# Altium PCB V40TestAdapter.PcbDoc
Units mil, origin at the board's own origin, x right, y up, seen from the top; angles counter-clockwise.
Board outline 3500 x 8470.09 mil, 2 copper layers (Top Layer, Bottom Layer); 26 components, 35 nets, 195 pads, 31 vias.
Unrouted connection lines stored in the file: 8.
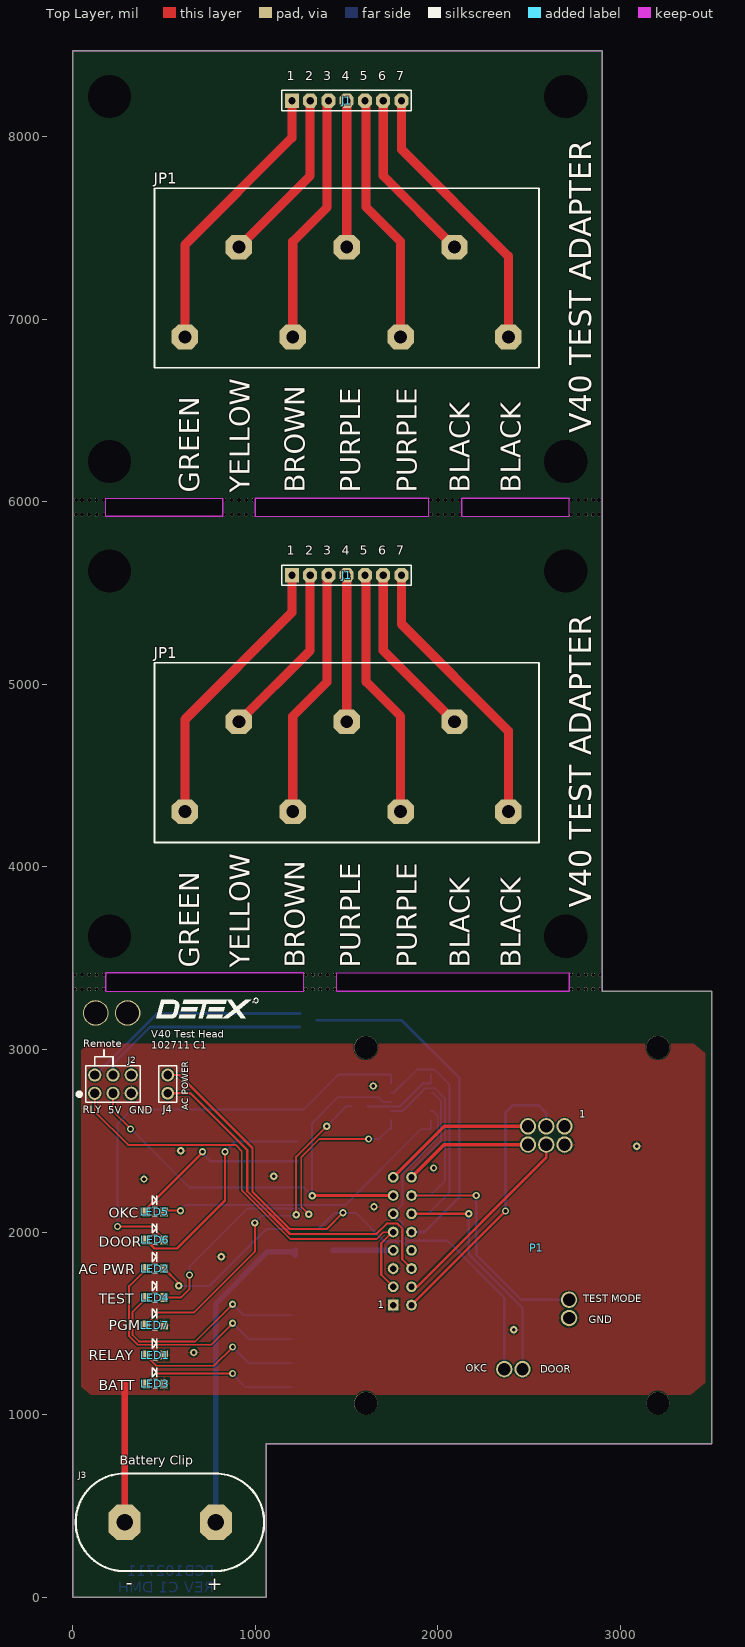
[diagram p0: Top Layer view]
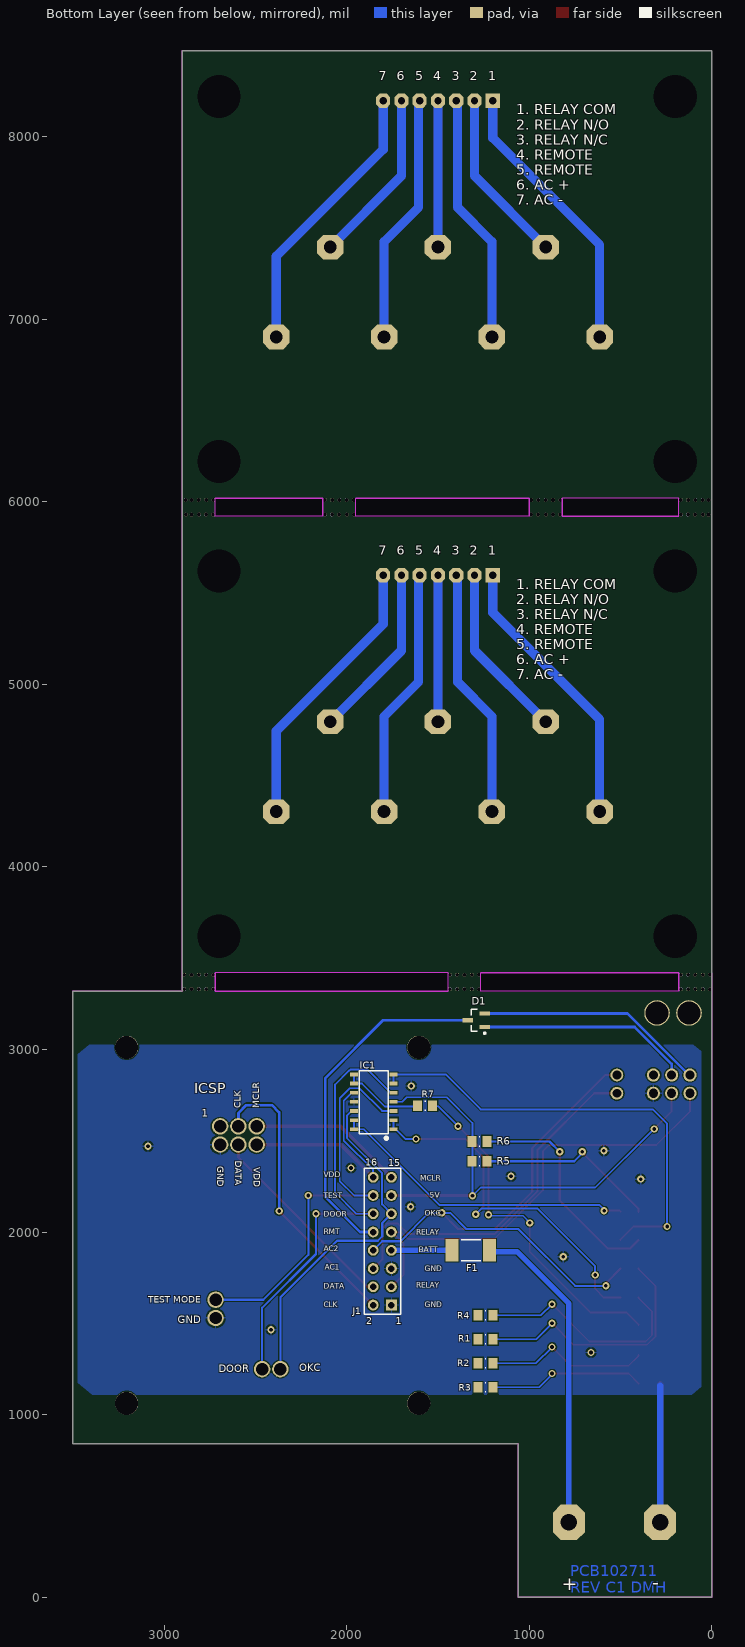
[diagram p1: Bottom Layer view, seen from below]

## Layer stack, top to bottom
Top Solder: solder mask 0.4, Solder Resist, Dk 3.5
Top Layer: signal copper 1.4
Dielectric 1: dielectric 12.6, FR-4, Dk 4.8
Bottom Layer: signal copper 1.4
Bottom Solder: solder mask 0.4, Solder Resist, Dk 3.5

## Board outline
0,0 1060,0 1060,840.16 3500,840.16 3500,3320.09 2900,3320.09 2900,8470.09 0,8470.09
cut-out: 1445,3320.09 1445,3420.09 2720,3420.09 2720,3320.09
cut-out: 1265,3320.09 1265,3420.09 180,3420.09 180,3320.09
cut-out: 1950,5920.09 1950,6020.09 1000,6020.09 1000,5920.09
cut-out: 2720,5920.09 2720,6020.09 2130,6020.09 2130,5920.09
cut-out: 180,5920.09 180,6020.09 820,6020.09 820,5920.09

## Design rules (kind name [scope] priority, off if disabled: settings)
Clearance [All] p1: gap=7 ignorepadtopadclearanceinfootprint=FALSE
PolygonConnect [All] p1: connectstyle=Relief reliefconductorwidth=10 reliefentries=4 polygonreliefangle="90 Angle" airgapwidth=10
RoutingVias [All] p1: holewidth=28 width=50 viastyle="Through Hole" minholewidth=28 minwidth=50 maxholewidth=28 maxwidth=50
SolderMaskExpansion [All] p1: expansion=4
Width [All] p1: maxlimit=150 minlimit=6 preferedwidth=12
30 further rules are at their usual default settings.

## Classes and differential pairs
component class V40TestAdapter: J1 JP1

## Components (designator, comment, footprint, x,y, rotation, side; value= is the part's Value field where it differs from the comment)
D1 "BAS70-05" SOT-23_M 1290,3160 r0 bottom
F1 "1812L050PR" LFUS-1812L050_V 1320,1900 r0 bottom
IC1 "LM324F-GE2" SOIC14 1743.46,2563.19 r90 bottom
J1 "2x8 Header" HDR2X8 1755,1600 r90 bottom
J1 "Header 7" HDR1X7 1200,8197.14 r0 top
J1 "Header 7" HDR1X7 1200,5597.14 r0 top
J2 "2x3 MOLEX" HDR2X3 120,2760 r0 top
J3 "DC POWER" BAT_CONN 783.47,409.45 r0 top locked
J4 "AC POWER" HDR1X2 520,2760 r90 top
JP1 "1792274" "7P TERMINAL BLOCK" 614.17,6902.97 r0 top locked
JP1 "1792274" "7P TERMINAL BLOCK" 614.17,4302.97 r0 top locked
LED1 "RELAY" LTST-C170YKT_V 450.47,1326.06 r0 top
LED2 "AC PWR" LTST-C170YKT_V 450.47,1800 r0 top
LED3 "BATT" LTST-C170YKT_V 451.18,1168.58 r0 top
LED4 "TEST" LTST-C170YKT_V 450.47,1641.02 r0 top
LED5 "OKC" LTST-C170YKT_V 450,2110 r0 top
LED6 "DOOR" LTST-C170YKT_V 450.47,1956.5 r0 top
LED7 "PGM" LTST-C170YKT_V 450,1490 r0 top
P1 "V40 POGOS" V40_POGOS 2693.19,2578.98 r0 top locked
R1 "Res1" RESC0805(2012)_M 1240,1412.5 r180 bottom value=3.3K
R2 "Res1" RESC0805(2012)_M 1240,1281.25 r180 bottom value=1K
R3 "Res1" RESC0805(2012)_M 1240,1150 r0 bottom value=1.5K
R4 "Res1" RESC0805(2012)_M 1240,1543.75 r180 bottom value=1K
R5 "Res1" RESC0805(2012)_M 1272,2388 r180 bottom value=1K
R6 "Res1" RESC0805(2012)_M 1272,2496 r0 bottom value=1K
R7 "Res1" RESC0805(2012)_M 1570,2692.15 r180 bottom value=1K

## Footprints (in the part's own frame and the unit in brackets; to place one, negate y for a bottom-side part, rotate by r counter-clockwise, add the part's x,y. Pads: shape width x height; smd on the part's side, far side on the other; paste and mask are expansions set on the pad)
"7P TERMINAL BLOCK" [mil] "Phoenix Contact - Push-Lock spring connection"
  oct 145x135 hole 70: 1(0,0) 2(295.28,492.13) 3(590.55,0) 4(885.83,492.13) 5(1181.1,0) 6(1476.38,492.13) 7(1771.65,0)
  silkscreen extent -167,-169 1939,815
BAT_CONN [mil]
  oct 175x195 hole 90: 1(0,0) 2(-500,0)
  silkscreen extent -768,-267 264,268
HDR1X2 [mil] "Connector; Header; 2 Position"
  round 70 hole 48: 1(0,0) 2(100,0)
  silkscreen extent -50,-50 150,50
HDR1X7 [mil] "Connector; Header; 7 Position"
  rect 77x80 hole 40: 1(0,0)
  oct 77x80 hole 40: 2(100,0) 3(200,0) 4(300,0) 5(400,0) 6(500,0) 7(600,0)
  silkscreen extent -56,-54 654,56
HDR2X3 [mil] "Connector; Header; 3x2 Position"
  round 72 hole 50: 1(0,0) 2(0,100) 3(100,0) 4(100,100) 5(200,0) 6(200,100)
  silkscreen extent -50,-50 250,150
HDR2X8 [mm] "Connector; Header; 8x2 Position"
  rect 1.5x1.5 hole 0.9: 1(0,0)
  round 1.5 hole 0.9: 2(0,2.54) 3(2.54,0) 4(2.54,2.54) 5(5.08,0) 6(5.08,2.54) 7(7.62,0) 8(7.62,2.54) 9(10.16,0) 10(10.16,2.54) 11(12.7,0) 12(12.7,2.54) 13(15.24,0) 14(15.24,2.54) 15(17.78,0) 16(17.78,2.54)
  silkscreen extent -1.27,-1.27 19.05,3.81
LFUS-1812L050_V [mm] "Chip Fuse, 2-Leads, Body 4.73x3.41mm"
  rect 1.78x3.15 smd: 1(-2.615,0) 2(2.615,0)
  silkscreen extent -1.35,-1.47 1.35,1.48, body extent -2.36,-1.7 2.36,1.7, height 0.75
LTST-C170YKT_V [mm] "SMD, 2-Leads, Body 2x1.25mm"
  rect 1.1x1.25 smd: 1(-1.25,0) 2(1.25,0)
  silkscreen extent -0.41,-0.63 0.3,2.25, body extent -1,-0.63 1,0.63, height 1.1
RESC0805(2012)_M [mm] "Chip Resistor, Body 2.0x1.3mm, IPC Low Density"
  rect 1.25x1.5 smd: 1(-1.05,0) 2(1.05,0)
  silkscreen extent -0.05,-0.65 0.05,0.65, body extent -1.1,-0.67 1.1,0.67, height 0.7
SOIC14 [mm]
  rect 0.51x1.1 smd: 1(0,0) 2(1.27,0) 3(2.54,0) 4(3.81,0) 5(5.08,0) 6(6.35,0) 7(7.62,0) 8(7.62,5.5) 9(6.35,5.5) 10(5.08,5.5) 11(3.81,5.5) 12(2.54,5.5) 13(1.27,5.5) 14(0,5.5)
  silkscreen extent -1.3,0.75 8.15,4.75, body extent -0.5,-0.29 8.1,5.79, height 1.65
SOT-23_M [mm] "SOT23, 3-Leads, Body 2.9x1.3mm, Pitch 0.95mm, Lead Span 2.5mm, IPC Low Density"
  rect 1.45x0.6 smd: 1(-1.175,0.95) 2(-1.175,-0.95) 3(1.175,0)
  silkscreen extent -1.3,-1.5 0.7,1.92, body extent -0.7,-1.5 0.7,1.5, height 1.1
V40_POGOS [mil]
  round 90 hole 68: 1(0,0) 2(0,-100) 3(-100,0) 4(-100,-100) 5(-200,0) 6(-200,-100) 7(25,-950) 8(25,-1050) 9(-230,-1330) 10(-330,-1330)

## Part data
D1: library part "D Schottky", "Dual Schottky Diode", MFR="DIODES, INC", ComponentLink1Description=Datasheet, ComponentLink1URL=http://www.mouser.com/ds/2/115/ds11007-768590.pdf, IFmax=70mA, MFR P/N=BAS70-05, PackageReference=SOT23
F1: library part CMP-1700-00002-1, "POLY-FUSE(R) Resettable PTC, 0.5 A, 0.15 to 1 Ohm Resistance, -40 to 85 degC, 1812 (4532 Metric), RoHS, Tape and Reel", Case\Package=0603, Case Code (Metric)=1608, Max Operating Temperature="155 degC", Min Operating Temperature="-55 degC", Package Quantity=1, Power Rating="100 mW", Resistance="150 kohm", Tolerance=1%, Voltage Rating="50 V", Case Code (Imperial)=0603, ComponentLink1Description="Manufacturer URL", ComponentLink1URL=http://www.littelfuse.com/, ComponentLink2Description=Datasheet, ComponentLink2URL=http://www.littelfuse.com/~/media/electronics/datasheets/resettable_ptcs/littelfuse_ptc_1812l_datasheet.pdf.pdf, DatasheetVersion=Feb-16, Height="0.45 mm", Length="1.6 mm", Mount="Surface Mount", PackageDescription="2-Pin Surface Mount Device, Body 4.55 x 3.24 mm", PackageReference=1812, Packaging="Tape and Reel", Pins=2, REACH SVHC="No SVHC", RoHSCompliant=true, Voltage Rating (DC)="50 V", Width="0.8 mm"
IC1: library part LM324F-GE2_1, "Quad Operational Amplifier 3-32V", ComponentLink1Description=Datasheet, ComponentLink1URL=https://www.mouser.com/ds/2/348/m358f-e-1265268.pdf
J1: library part "2x9 Header", DESC="8x2 HEADER"
J1 J1: "Header, 7-Pin", LatestRevisionDate=17-Jul-2002, LatestRevisionNote="Re-released for DXP Platform.", Publisher="Altium Limited"
J2: library part "Header 3X2", "Header, 3-Pin, Dual row", LatestRevisionDate=17-Jul-2002, LatestRevisionNote="Re-released for DXP Platform.", Publisher="Altium Limited"
J3 J4: library part "Header 2", "Header, 2-Pin", LatestRevisionDate=17-Jul-2002, LatestRevisionNote="Re-released for DXP Platform.", Publisher="Altium Limited"
JP1 JP1: library part "PCB Terminal Block"
LED1: library part CMP-1674-00007-1, "LED Uni-Color Green, 100 mW, 5 V, -55 to 85 degC, 2-Pin SMD, RoHS, Tape and Reel", ComponentLink1Description="Manufacturer URL", ComponentLink1URL=http://www.us.liteon.com/, ComponentLink2Description=Datasheet, ComponentLink2URL=http://datasheet.octopart.com/LTST-C190GKT-Lite-On-datasheet-158530.pdf, DatasheetVersion=Dec-06, PackageDescription="2-Pin Surface Mount Device, Body 1.6 x 0.8 mm", PackageReference=C190GKT
LED2 LED3: library part LED-ORANGE-AK-2
LED4: library part CMP-1674-00003-5, "LED Uni-Color Yellow, 60 mW, 80 mA, -55 to 85 degC, 2-Pin SMD, RoHS, Tape and Reel", Colour=Yellow, Manufacturer=Lite-On, Max Operating Temperature="85 degC", Min Operating Temperature="-55 degC", Package Quantity=3000, ComponentLink1Description="Manufacturer URL", ComponentLink1URL=http://www.us.liteon.com/, ComponentLink2Description=Datasheet, ComponentLink2URL="http://media.digikey.com/pdf/Data Sheets/Lite-On PDFs/LTST-C170YKT.pdf", DatasheetVersion=03/2000, DESC=TEST, Height="1.1 mm", Length="2 mm", Mount="Surface Mount", Mounting Technology="Surface Mount", PackageDescription="2-Pin Surface Mount Device, Body 2 x 1.25 mm", PackageReference=C170YKT, Packaging="Tape and Reel", Pins=2, RoHSCompliant=true
LED5 LED6 LED7: library part CMP-1674-00001-5, "LED Uni-Color Red, 100 mW, 200 mA, -55 to 85 degC, 2-Pin SMD, RoHS, Tape and Reel", Colour=Red, Manufacturer=Lite-On, Max Operating Temperature="85 degC", Min Operating Temperature="-55 degC", Package Quantity=3000, ComponentLink1Description="Manufacturer URL", ComponentLink1URL=http://www.us.liteon.com/, ComponentLink2Description=Datasheet, ComponentLink2URL=http://media.digikey.com/pdf/Data%20Sheets/Lite-On%20PDFs/LTST-C170CKT.pdf, DatasheetVersion=03/2003, Height="1.1 mm", Length="2 mm", Mount="Surface Mount", Mounting Technology="Surface Mount", PackageDescription="2-Pin Surface Mount Device, Body 2 x 1.25 mm", PackageReference=C170CKT, Packaging="Tape and Reel", Pins=2, RoHSCompliant=true
  LED5: DESC=OKC
  LED6: DESC=DOOR
  LED7: DESC=PGM
P1: library part V40_POGOS
R1 R2 R3 R4 R5 R6 R7: "Resistor", LatestRevisionDate=17-Jul-2002, LatestRevisionNote="Re-released for DXP Platform.", PackageDescription="Axial Device, Thru-Hole; 2 Leads; 0.3 in Pin Spacing", PackageReference=AXIAL-0.3, Published=8-Jun-2000, Publisher="Altium Limited"

## Free pads (board coordinates)
  round 20 hole 20 unplated paste+0 mask+0: 0(10,3330) 0(10,3410) 0(18,5930.09) 0(18,6010.09) 0(50,3330) 0(50,3410) 0(50,5930.09) 0(50,6010.09) 0(90,3330) 0(90,3410) 0(90,5930.09) 0(90,6010.09) 0(130,3330) 0(130,3410) 0(130,5930.09) 0(130,6010.09) 0(170,3330) 0(170,3410) 0(170,5930.09) 0(170,6010.09) 0(830,5930.09) 0(830,6010.09) 0(870,5930.09) 0(870,6010.09) 0(910,5930.09) 0(910,6010.09) 0(950,5930.09) 0(950,6010.09) 0(990,5930.09) 0(990,6010.09) 0(1275,3330) 0(1275,3410) 0(1315,3330) 0(1315,3410) 0(1355,3330) 0(1355,3410) 0(1395,3330) 0(1395,3410) 0(1435,3330) 0(1435,3410) 0(1960,5930.09) 0(1960,6010.09) 0(2000,5930.09) 0(2000,6010.09) 0(2040,5930.09) 0(2040,6010.09) 0(2080,5930.09) 0(2080,6010.09) 0(2120,5930.09) 0(2120,6010.09) 0(2730,3330) 0(2730,3410) 0(2730,5930.09) 0(2730,6010.09) 0(2770,3330) 0(2770,3410) 0(2770,5930.09) 0(2770,6010.09) 0(2810,3330) 0(2810,3410) 0(2810,5930.09) 0(2810,6010.09) 0(2850,3330) 0(2850,3410) 0(2850,5930.09) 0(2850,6010.09) 0(2882,5930.09) 0(2882,6010.09) 0(2890,3330) 0(2890,3410)
  round 140 hole 127: 0(125,3200) 0(300,3200)
  round 82.68 hole 236.22 unplated paste+0 mask+0: 0(200,3620.09) 0(200,5620.09) 0(200,6220.09) 0(200,8220.09) 0(2700,3620.09) 0(2700,5620.09) 0(2700,6220.09) 0(2700,8220.09)
  round 126 hole 126 unplated paste+0 mask+0: 0(1605,1061.66) 0(1605,3011.66) 0(3205,1061.66) 0(3205,3011.66)

## Via types
v1: diameter 40, hole 20, Top Layer to Bottom Layer, tented both sides, 30 vias
v2: diameter 40, hole 20, Top Layer to Bottom Layer, 1 vias

## Nets (pads, with @x,y where several pads share a name; then routed paths per layer and width w, separated by ;. In a path a pad name is that pad's centre, name@x,y a point inside that pad or via, vN(x,y) a via of type N, cw(c..) or ccw(c..) an arc to the next point about the centre after c; other vN are vias at no path point)
5V: IC1.4 J1.13 J2.3 R4.1 R5.1 R6.2 | length 2728.3
  Top Layer w10: J2.3 220,2662 316,2566 v1(316,2564)
  Top Layer w15: v1(1310.69,2199) 1311.69,2200 J1.13
  Bottom Layer w10: v1(316,2564) 316,2566 638,2244 1265.69,2244 v1(1310.69,2199) 1310.69,2596.69 1451.85,2737.85 1672.15,2737.85 1696.81,2713.19 IC1.4
AC1: J1.6@1855,1800 J4.1 R1.1 | length 2011
  Top Layer w12: J4.1 644,2760 955.12,2448.88 955.12,2223.33 1189.46,1989 1662.69,1989 1719.69,2046 1778,2046 1804,2020 1804,1851 J1.6@1855,1800
AC2: J1.8 J4.2 LED2.2 | length 3139.3
  Top Layer w12: LED2.2 580,1719.69 v1(580,1705) ; J4.2 584,2860 984,2460 984,2221.33 1188.33,2017 1390.59,2017 1478.59,2105 v1(1480,2105)
  Bottom Layer w12: v1(580,1705) 748.1,1705 1060.1,2017 1345.09,2017 1433.09,2105 v1(1480,2105) 1549.69,2105 1704.69,1950 1805,1950 J1.8
BATT: F1.1 J3.1 R3.2 | length 1785.1
  Bottom Layer w30: J3.1 783.47,1608.47 1067.23,1892.23 1197.85,1892.23 1217.05,1873.03 F1.1
CLK: J1.2@1855,1600 P1.3 | length 1598.8
  Top Layer w15: J1.2@1855,1600 v2(2370,2115)
  Bottom Layer w15: v2(2370,2115) 2370,2655 2410,2695 2550,2695 2593.19,2651.81 P1.3
DATA: J1.4@1855,1700 P1.4 | length 1102.3
  Top Layer w15: J1.4@1855,1700 1885,1700 2593.19,2408.19 P1.4
DOOR: IC1.5 J1.12 P1.9 | length 2541.9
  Top Layer w12: J1.12 v1(2168.32,2100)
  Bottom Layer w10: IC1.5 1758.19,2763.19 1885,2890 1980.44,2890 1985.21,2885.23 1986.62,2885.23 2064,2807.85 2064,2217 1947,2100 J1.12
  Bottom Layer w12: v1(2168.32,2100) 2168.32,1879.69 2463.19,1584.81 P1.9
GND: IC1.11 J1.1@1755,1600 J1.5@1755,1800 J2.5 J3.2 LED1.2 LED3.2 LED7.2 P1.2 P1.8 | length 1506.2
  Top Layer w35: J3.2 283.47,1166.54
  Bottom Layer w35: 282,1158 283.47,1156.54 J3.2
  other v1: 662,1340 2414.46,1465 813.46,1865 1650,2138.51 390,2290 1100,2305 1976,2350.85 591.02,2445 3088.19,2470 1646.2,2800
MCLR: J1.15 P1.5 | length 853.7
  Top Layer w20: J1.15 2033.98,2578.98 P1.5
NetD1_1: D1.1 J2.4 | length 1167.7
  Bottom Layer w15: J2.4 220,2920 422.6,3122.6 D1.1
NetD1_2: D1.2 J2.2 | length 1263.5
  Bottom Layer w15: J2.2 125,2860 462.4,3197.4 D1.2
NetF1_2: F1.2 J1.7@1755,1900 | length 332
  Bottom Layer w30: F1.2 J1.7@1755,1900
NetIC1_1: IC1.1 IC1.2 LED4.2 | length 2024
  Top Layer w10: LED4.2 591.02,1641.02 639.26,1689.26 v1@639.26,1772.22 ; v1(1293,2097) 1251,2139 1251,2410 1351,2510 v1(1620,2510)
  Bottom Layer w10: v1(639.26,1765) 639.26,1811.38 957.11,2129.23 1260.77,2129.23 v1(1293,2097) ; v1(1620,2510) 1678.66,2510 1731.85,2563.19 IC1.1 IC1.2
NetIC1_6: IC1.6 IC1.7 LED6.2 | length 2510.9
  Top Layer w10: v1(245,2030) 430,2030 499.69,1960.31 LED6.2
  Bottom Layer w10: v1(245,2030) 245,2593.2 323.74,2671.94 1266.25,2671.94 1457.5,2863.19 IC1.7 IC1.6
NetIC1_8: IC1.8 IC1.9 R7.1 | length 448.7
  Bottom Layer w10: R7.1@1614.35,2688.78 1616.13,2687 1789.98,2687 1916.17,2813.19 IC1.9 IC1.8
NetIC1_13: IC1.13 IC1.14 LED5.2 | length 1718.2
  Top Layer w10: LED5.2 506.38,2117.17 578.91,2117.17 590,2128.26 v1(590,2117.17)
  Bottom Layer w10: v1(590,2117.17) 590,2124 613.43,2147.43 1491.43,2147.43 1907.19,2563.19 IC1.14 IC1.13
NetJ1_1: J1.1@1200,5597.14 JP1.1@614.17,4302.97 | length 3073.7
  Top Layer w50: JP1.1@614.17,4302.97 614.17,4807.47 1200,5393.29 J1.1@1200,5597.14
  Bottom Layer w50: JP1.1@614.17,4302.97 614.17,4807.47 1200,5393.29 J1.1@1200,5597.14
NetJ1_2: J1.2@1300,5597.14 JP1.2@909.45,4795.09 | length 1927.6
  Top Layer w50: JP1.2@909.45,4795.09 1300,5185.64 J1.2@1300,5597.14
  Bottom Layer w50: JP1.2@909.45,4795.09 1300,5185.64 J1.2@1300,5597.14
NetJ1_3: J1.3@1400,5597.14 JP1.3@1204.72,4302.97 | length 2750.1
  Top Layer w50: JP1.3@1204.72,4302.97 1204.72,4824.82 1393.17,5013.27 1393.17,5590.31 J1.3@1400,5597.14
  Bottom Layer w50: JP1.3@1204.72,4302.97 1204.72,4824.82 1393.17,5013.27 1393.17,5590.31 J1.3@1400,5597.14
NetJ1_4: J1.4@1500,5597.14 JP1.4@1500,4795.09 | length 1620.6
  Top Layer w30: J1.4@1494.17,5602.97 J1.4@1500,5597.14
  Top Layer w50: JP1.4@1500,4795.09 J1.4@1500,5597.14
  Bottom Layer w30: J1.4@1494.17,5602.97 J1.4@1500,5597.14
  Bottom Layer w50: JP1.4@1500,4795.09 J1.4@1500,5597.14
NetJ1_5: J1.5@1600,5597.14 JP1.5@1795.28,4302.97 | length 2750.1
  Top Layer w50: J1.5@1600,5597.14 1606.17,5590.97 1606.17,5013.92 1795.28,4824.82 JP1.5@1795.28,4302.97
  Bottom Layer w50: J1.5@1600,5597.14 1606.17,5590.97 1606.17,5013.92 1795.28,4824.82 JP1.5@1795.28,4302.97
NetJ1_6: J1.6@1700,5597.14 JP1.6@2090.55,4795.09 | length 1927.6
  Top Layer w50: J1.6@1700,5597.14 1700,5185.64 JP1.6@2090.55,4795.09
  Bottom Layer w50: J1.6@1700,5597.14 1700,5185.64 JP1.6@2090.55,4795.09
NetJ1_7: J1.7@1800,5597.14 JP1.7@2385.83,4302.97 | length 3073.7
  Top Layer w50: J1.7@1800,5597.14 1800,5330.54 2385.83,4744.71 JP1.7@2385.83,4302.97
  Bottom Layer w50: J1.7@1800,5597.14 1800,5330.54 2385.83,4744.71 JP1.7@2385.83,4302.97
NetLED1_1: LED1.1 R2.2 | length 902.2
  Top Layer w10: LED1.1 401.26,1323.11 456.37,1268 773,1268 v1(875,1370)
  Bottom Layer w10: v1(875,1370) 963.75,1281.25 R2.2
NetLED2_1: LED2.1 R1.2 | length 1403.5
  Top Layer w10: LED2.1 401.26,1797.05 308,1703.79 308,1430 355,1383 758,1383 v1(875,1500)
  Bottom Layer w10: v1(875,1500) 962.5,1412.5 R1.2
NetLED3_1: LED3.1 R3.1 | length 855.8
  Top Layer w10: LED3.1 401.97,1171.54 455.43,1225 v1(875,1225)
  Bottom Layer w10: v1(875,1225) 875,1220 945,1150 R3.1
NetLED4_1: LED4.1 R4.2 | length 1232.4
  Top Layer w10: LED4.1 401.26,1638.07 327,1563.81 327,1436 362.74,1400.26 670.26,1400.26 v1(875,1605)
  Bottom Layer w10: v1(875,1605) 936.25,1543.75 R4.2
NetLED5_1: LED5.1 R5.2 | length 1005
  Top Layer w12: LED5.1 400.79,2125.79 704.64,2429.64 704.64,2434.64 v1(710,2440)
  Bottom Layer w12: v1(710,2440) 710,2432 754,2388 R5.2
NetLED6_1: LED6.1 R6.1 | length 1247.7
  Top Layer w12: LED6.1 447.76,1910 570,1910 833.12,2173.13 v1(833.12,2440)
  Bottom Layer w12: v1(833.12,2440) 889.12,2496 R6.1
NetLED7_1: LED7.1 R7.2 | length 1919.7
  Top Layer w10: LED7.1 400.79,1492.95 467.83,1560 665,1560 997,1892 v1(997,2050) ; v1(1223,2094) 1223,2413 v1(1390,2580)
  Bottom Layer w10: v1(997,2050) 997,2052 1034.19,2089.19 1216.81,2089.19 1223,2083 v1(1223,2094) ; v1(1390,2580) 1498.78,2688.78 R7.2@1530,2688.78
OKC: IC1.12 J1.11 P1.10 | length 1920.8
  Bottom Layer w10: J1.11 1806,2151 1806,2322.24 1999,2515.24 1999,2635.8 1971.61,2663.19 IC1.12
  Bottom Layer w12: J1.11 1805,2050 1805,1977 1830,1952 2053,1952 2363.19,1641.81 P1.10
RELAY_COM: J1.3@1755,1700 J1.9 J2.1 R2.1 | length 2522.1
  Top Layer w10: J2.1 120,2660 303,2477 891.54,2477 925,2443.54 925,2228 1191,1962 1664,1962 1701,1999 1754,1999 J1.9
  Top Layer w12: J1.9@1752.79,2002.21 1689,1938.42 1689,1766 J1.3@1755,1700
RMT: D1.3 J1.10 | length 1905.2
  Bottom Layer w15: D1.3 1800,3160 2117,2843 2117,2191 1926,2000 J1.10
TEST: IC1.3 J1.14 P1.7 | length 2328.6
  Top Layer w12: J1.14 v1(2210,2200)
  Bottom Layer w10: IC1.3 1806.35,2663.19 1931.16,2788 1982.44,2788 1985.21,2785.23 1986.62,2785.23 2038,2733.85 2038,2279.26 1958.74,2200 J1.14
  Bottom Layer w12: v1(2210,2200) 2210,1876 2457.02,1628.98 P1.7
VDD: IC1.10 J1.16 P1.6 | length 1272.2
  Top Layer w20: J1.16 2033.98,2478.98 P1.6
  Bottom Layer w10: J1.16 1855,2340 2016,2501 2016,2718.8 1971.61,2763.19 IC1.10
pads on no net: J1.1@1200,8197.14 J1.2@1300,8197.14 J1.3@1400,8197.14 J1.4@1500,8197.14 J1.5@1600,8197.14 J1.6@1700,8197.14 J1.7@1800,8197.14 J2.6 JP1.1@614.17,6902.97 JP1.2@909.45,7395.09 JP1.3@1204.72,6902.97 JP1.4@1500,7395.09 JP1.5@1795.28,6902.97 JP1.6@2090.55,7395.09 JP1.7@2385.83,6902.97 P1.1
copper on no net: | length 17123.4
  Top Layer w30: 1494.17,8202.97 1500,8197.14
  Top Layer w50: 614.17,6902.97 614.17,7407.47 1200,7993.29 1200,8197.14 ; 909.45,7395.09 1300,7785.64 1300,8197.14 ; 1204.72,6902.97 1204.72,7424.82 1393.17,7613.27 1393.17,8190.31 1400,8197.14 ; 1500,7395.09 1500,8197.14 ; 1600,8197.14 1606.17,8190.97 1606.17,7613.92 1795.28,7424.82 1795.28,6902.97 ; 1700,8197.14 1700,7785.64 2090.55,7395.09 ; 1800,8197.14 1800,7930.54 2385.83,7344.71 2385.83,6902.97
  Bottom Layer w30: 1494.17,8202.97 1500,8197.14
  Bottom Layer w50: 614.17,6902.97 614.17,7407.47 1200,7993.29 1200,8197.14 ; 909.45,7395.09 1300,7785.64 1300,8197.14 ; 1204.72,6902.97 1204.72,7424.82 1393.17,7613.27 1393.17,8190.31 1400,8197.14 ; 1500,7395.09 1500,8197.14 ; 1600,8197.14 1606.17,8190.97 1606.17,7613.92 1795.28,7424.82 1795.28,6902.97 ; 1700,8197.14 1700,7785.64 2090.55,7395.09 ; 1800,8197.14 1800,7930.54 2385.83,7344.71 2385.83,6902.97

## Polygon pours and split planes (outlines as drawn)
GND on Top Layer "GND_L01_P004" (solid, remove dead copper, pour order 4): 45,2995.94 88.43,3030 3399.86,3030 3465,2978.91 3465,1173.86 3383.57,1110 99.29,1110 45,1152.57
GND on Bottom Layer "Top Layer-No Net" (solid, remove dead copper, pour order 6): 57,2991.03 100.39,3025 3408.91,3025 3474,2974.05 3474,1173.69 3392.64,1110 111.24,1110 57,1152.46

## Keep-outs
Keep-Out Layer:
  lines w1: 0,0 1059.84,0 1059.84,840.16 3500,840.16 3500,3320.09 2900,3320.09 2900,4100.09 2900,8470.09 2040,8470.09 0,8470.09 0,3420.09 0,0 ; 180,3320 1265,3320 1265,3420 180,3420 180,3372 180,3320 ; 180,5920.09 180,5972.09 180,6020.09 820,6020.09 820,5920.09 180,5920.09 ; 1000,5920.09 1950,5920.09 1950,5962.09 1950,6020.09 1000,6020.09 1000,5920.09 ; 1445,3320.09 2720,3320.09 2720,3420.09 1445,3420.09 1445,3372.09 1445,3320.09 ; 2130,5920.09 2720,5920.09 2720,6020.09 2130,6020.09 2130,5975.09 2130,5920.09

## Other copper
Bottom Layer:
  text "PCB102711 / REV C1 DMH" at 775,24 h60

## Silkscreen, mask and mechanical layers (free items; w line width, h text height)
Top Overlay:
  circle w4: c1003.69,3268.25 r12
  circle w21: c35,2755 r10
  region: 842,3271 836.5,3250 732,3250 710.5,3170.25 689.75,3170.25 711,3250 602,3250 607.5,3271
  region: 871.75,3271 899,3234.25 945,3271 978.5,3271 911.25,3217.5 946.75,3170.25 920.5,3170.25 895,3204.5 852,3170.25 818.5,3170.25 882.5,3221.25 845.5,3271
  region: 737.75,3191.25 820.75,3191 815,3170 732,3170
  region: 748.5,3231 831.25,3231 825.75,3210 742.75,3210
  region: 597,3231 683.25,3231 677.5,3210 591.25,3210
  region: 586.25,3191.25 672.5,3191.25 666.75,3170.25 580.5,3170.25
  region: 499.75,3271 551.5,3271 554.5,3270.75 557,3270.5 560.25,3269.75 563,3268.75 566.25,3267.25 569,3265.5 572.25,3263.25 574.75,3260.5 576.75,3258.25 579,3254.75 580.75,3250.75 582,3246.5 582.75,3242.25 582.5,3237.5 582.25,3234 570.75,3191.75 569.75,3189 568.25,3186.25 566.25,3182.75 563.75,3179.75 560.75,3177.25 558.25,3175.25 556,3173.75 553.25,3172.75 549.5,3171.25 545.25,3170.5 543,3170.25 476.25,3170.25 483.5,3191.25 542.5,3191.25 545,3191.75 546,3192.25 547.5,3193.25 548.75,3194.5 549.75,3195.75 550.75,3197.75 551.5,3200.25 561.75,3241.75 561.5,3243 561,3244 560.25,3245.25 558.75,3246.75 557.75,3248 555,3249.5 553.5,3250 551.5,3250.25 499.25,3250
  region: 504.75,3271 477.75,3170.25 456,3170.25 483,3271
  lines w10: 120,2910 120,2960 220,2960 220,2910 ; 170,2960 170,2997.35
  text "1" at 1172.37,8309.17 h50.39
  text "2" at 1272.27,8309.17 h50.39
  text "3" at 1372.17,8309.17 h50.39
  text "4" at 1472.07,8309.17 h50.39
  text "5" at 1571.97,8309.17 h50.39
  text "6" at 1671.87,8309.17 h50.39
  text "7" at 1771.77,8309.17 h50.39
  text "V40 TEST ADAPTER" at 2840,6375.09 h120 r90
  text "GREEN" at 691.47,6048.87 h110 r90
  text "YELLOW" at 970.07,6048.87 h110 r90
  text "BROWN" at 1270.97,6048.87 h110 r90
  text "PURPLE" at 1575.57,6048.87 h110 r90
  text "PURPLE" at 1883.87,6048.87 h110 r90
  text "BLACK" at 2173.57,6048.87 h110 r90
  text "BLACK" at 2452.17,6048.87 h110 r90
  text "1" at 1172.37,5709.17 h50.39
  text "2" at 1272.27,5709.17 h50.39
  text "3" at 1372.17,5709.17 h50.39
  text "4" at 1472.07,5709.17 h50.39
  text "5" at 1571.97,5709.17 h50.39
  text "6" at 1671.87,5709.17 h50.39
  text "7" at 1771.77,5709.17 h50.39
  text "V40 TEST ADAPTER" at 2840,3775.09 h120 r90
  text "GREEN" at 691.47,3448.87 h110 r90
  text "YELLOW" at 970.07,3448.87 h110 r90
  text "BROWN" at 1270.97,3448.87 h110 r90
  text "PURPLE" at 1575.57,3448.87 h110 r90
  text "PURPLE" at 1883.87,3448.87 h110 r90
  text "BLACK" at 2173.57,3448.87 h110 r90
  text "BLACK" at 2452.17,3448.87 h110 r90
  text "R" at 983,3246 h25
  text "Remote" at 58,3012 h40
  text "V40 Test Head / 102711 C1" at 430,3005 h40
  text "AC POWER" at 632.12,2666.42 h35 r90
  text "RLY" at 55,2651.19 h40
  text "5V" at 195,2649.19 h40
  text "GND" at 307.99,2649.19 h40
  text "1" at 1671,1582 h40
  text "GND" at 2825,1500 h40
Bottom Overlay:
  text "1" at 1225,8310.09 h50.39
  text "2" at 1325,8310.09 h50.39
  text "3" at 1425,8310.09 h50.39
  text "4" at 1525,8310.09 h50.39
  text "5" at 1625,8310.09 h50.39
  text "6" at 1725,8310.09 h50.39
  text "7" at 1825,8310.09 h50.39
  text "1. RELAY COM / 2. RELAY N/O / 3. RELAY N/C / 4. REMOTE / 5. REMOTE / 6. AC + / 7. AC -" at 1070.27,7626.67 h55
  text "1" at 1225,5710.09 h50.39
  text "2" at 1325,5710.09 h50.39
  text "3" at 1425,5710.09 h50.39
  text "4" at 1525,5710.09 h50.39
  text "5" at 1625,5710.09 h50.39
  text "6" at 1725,5710.09 h50.39
  text "7" at 1825,5710.09 h50.39
  text "1. RELAY COM / 2. RELAY N/O / 3. RELAY N/C / 4. REMOTE / 5. REMOTE / 6. AC + / 7. AC -" at 1070.27,5026.67 h55
  text "MCLR" at 2480,2679 h35 r270
  text "CLK" at 2580,2679 h35 r270
  text "DATA" at 2610,2390 h35 r90
  text "GND" at 2710,2359.17 h35 r90
  text "VDD" at 2510,2355.51 h35 r90
  text "VDD" at 2125,2300 h30
  text "MCLR" at 1596.72,2282 h30
  text "5V" at 1544.59,2188 h30
  text "TEST" at 2125,2186 h30
  text "OKC" at 1573.01,2090 h30
  text "DOOR" at 2125,2084 h30
  text "RMT" at 2125,1988 h30
  text "RELAY" at 1618.43,1986 h30
  text "AC2" at 2125,1894 h30
  text "BATT" at 1603.98,1890 h30
  text "AC1" at 2120,1794 h30
  text "GND" at 1571.59,1784 h30
  text "RELAY" at 1618.43,1696 h30
  text "DATA" at 2125,1688 h30
  text "GND" at 1571.59,1588 h30
  text "CLK" at 2125,1588 h30
  text "GND" at 2925,1500 h40
Drill Drawing:
  circle w12: c317.82,11387.94 r26.67
  circle w12: c317.82,11387.94 r44.44
  circle w12: c317.82,10987.94 r44.44
  lines w1: 2900,5920.09 2900,3420.09 0,3420.09 0,5920.09 0,6020.09 0,6139.09 0,8470.09 1002,8470.09 2900,8470.09 2900,5920.09 ; 2900,5920.09 2900,5920.09 ; 180,5920.09 820,5920.09 820,6020.09 180,6020.09 180,5972.09 180,5920.09 ; 1000,5920.09 1000,6020.09 1950,6020.09 1950,5962.09 1950,5920.09 1000,5920.09
  lines w12: 273.38,9743.5 362.27,9743.5 362.27,9832.39 273.38,9832.39 273.38,9743.5 ; 273.38,9943.5 317.82,9965.72 362.27,9943.5 340.04,9987.94 362.27,10032.39 317.82,10010.17 273.38,10032.39 295.6,9987.94 273.38,9943.5 ; 273.38,10187.94 317.82,10143.5 362.27,10187.94 317.82,10232.39 273.38,10187.94 ; 273.38,10365.72 295.6,10365.72 317.82,10343.5 340.04,10365.72 362.27,10365.72 340.04,10387.94 362.27,10410.17 340.04,10410.17 317.82,10432.39 295.6,10410.17 273.38,10410.17 295.6,10387.94 273.38,10365.72 ; 273.38,10632.39 362.27,10632.39 317.82,10543.5 273.38,10632.39 ; 273.38,10743.5 273.38,10765.72 295.6,10787.94 273.38,10810.17 273.38,10832.39 295.6,10832.39 317.82,10810.17 340.04,10832.39 362.27,10832.39 362.27,10810.17 340.04,10787.94 362.27,10765.72 362.27,10743.5 340.04,10743.5 317.82,10765.72 295.6,10743.5 273.38,10743.5 ; 273.38,11165.72 295.6,11165.72 295.6,11143.5 340.04,11143.5 340.04,11165.72 362.27,11165.72 362.27,11210.17 340.04,11210.17 340.04,11232.39 295.6,11232.39 295.6,11210.17 273.38,11210.17 273.38,11165.72 ; 273.38,11565.72 295.6,11565.72 317.82,11543.5 340.04,11565.72 362.27,11565.72 340.04,11587.94 362.27,11610.17 340.04,11610.17 317.82,11632.39 295.6,11610.17 273.38,11610.17 295.6,11587.94 273.38,11565.72 ; 273.38,11832.39 362.27,11832.39 317.82,11743.5 273.38,11832.39 ; 273.38,11943.5 362.27,11943.5 362.27,12032.39 273.38,12032.39 273.38,11943.5 ; 273.38,12143.5 317.82,12165.72 362.27,12143.5 340.04,12187.94 362.27,12232.39 317.82,12210.17 273.38,12232.39 295.6,12187.94 273.38,12143.5 ; 291.15,9961.28 317.82,9974.61 344.49,9961.28 331.15,9987.94 344.49,10014.61 317.82,10001.28 291.15,10014.61 304.49,9987.94 291.15,9961.28 ; 291.15,11574.61 304.49,11574.61 317.82,11561.28 331.15,11574.61 344.49,11574.61 331.15,11587.94 344.49,11601.28 331.15,11601.28 317.82,11614.61 304.49,11601.28 291.15,11601.28 304.49,11587.94 291.15,11574.61 ; 291.15,11814.61 344.49,11814.61 317.82,11761.28 291.15,11814.61 ; 291.15,11961.28 344.49,11961.28 344.49,12014.61 291.15,12014.61 291.15,11961.28
  lines w15: 194.07,9683.5 8503.77,9683.5 ; 194.07,12283.5 8503.77,12283.5 ; 924.31,9483.5 924.31,12483.5 ; 1708.1,9483.5 1708.1,12483.5 ; 3251.65,9483.5 3251.65,12483.5 ; 3921.88,9483.5 3921.88,12483.5 ; 4896.02,9483.5 4896.02,12483.5 ; 6669.89,9483.5 6669.89,12483.5 ; 194.07,9483.5 8503.77,9483.5 8503.77,12483.5 194.07,12483.5 194.07,9483.5
  text "Symbol" at 314.07,12343.5 h96
  text "Count" at 984.31,12343.5 h96
  text "Hole Size" at 1768.1,12343.5 h96
  text "Plated" at 3311.65,12343.5 h96
  text "Hole Type" at 3981.88,12343.5 h96
  text "Hole Tolerance (+)" at 4956.02,12343.5 h96
  text "Hole Tolerance (-)" at 6729.89,12343.5 h96
  text "2" at 984.31,12143.5 h80
  text "48.00mil (1.219mm)" at 1768.1,12143.5 h80
  text "PTH" at 3311.65,12143.5 h80
  text "Round" at 3981.88,12143.5 h80
  text "2" at 984.31,11943.5 h80
  text "90.00mil (2.286mm)" at 1768.1,11943.5 h80
  text "PTH" at 3311.65,11943.5 h80
  text "Round" at 3981.88,11943.5 h80
  text "2" at 984.31,11743.5 h80
  text "126.00mil (3.200mm)" at 1768.1,11743.5 h80
  text "NPTH" at 3311.65,11743.5 h80
  text "Round" at 3981.88,11743.5 h80
  text "3.00mil (0.076mm)" at 4956.02,11743.5 h80
  text "3.00mil (0.076mm)" at 6729.89,11743.5 h80
  text "2" at 984.31,11543.5 h80
  text "126.00mil (3.200mm)" at 1768.1,11543.5 h80
  text "NPTH" at 3311.65,11543.5 h80
  text "Round" at 3981.88,11543.5 h80
  text "2" at 984.31,11343.5 h80
  text "127.00mil (3.226mm)" at 1768.1,11343.5 h80
  text "PTH" at 3311.65,11343.5 h80
  text "Round" at 3981.88,11343.5 h80
  text "6" at 984.31,11143.5 h80
  text "50.00mil (1.270mm)" at 1768.1,11143.5 h80
  text "PTH" at 3311.65,11143.5 h80
  text "Round" at 3981.88,11143.5 h80
  text "8" at 984.31,10943.5 h80
  text "236.22mil (6.000mm)" at 1768.1,10943.5 h80
  text "NPTH" at 3311.65,10943.5 h80
  text "Round" at 3981.88,10943.5 h80
  text "3.00mil (0.076mm)" at 4956.02,10943.5 h80
  text "3.00mil (0.076mm)" at 6729.89,10943.5 h80
  text "10" at 984.31,10743.5 h80
  text "68.00mil (1.727mm)" at 1768.1,10743.5 h80
  text "PTH" at 3311.65,10743.5 h80
  text "Round" at 3981.88,10743.5 h80
  text "14" at 984.31,10543.5 h80
  text "40.00mil (1.016mm)" at 1768.1,10543.5 h80
  text "PTH" at 3311.65,10543.5 h80
  text "Round" at 3981.88,10543.5 h80
  text "3.00mil (0.076mm)" at 4956.02,10543.5 h80
  text "3.00mil (0.076mm)" at 6729.89,10543.5 h80
  text "14" at 984.31,10343.5 h80
  text "70.00mil (1.778mm)" at 1768.1,10343.5 h80
  text "PTH" at 3311.65,10343.5 h80
  text "Round" at 3981.88,10343.5 h80
  text "3.00mil (0.076mm)" at 4956.02,10343.5 h80
  text "3.00mil (0.076mm)" at 6729.89,10343.5 h80
  text "16" at 984.31,10143.5 h80
  text "35.43mil (0.900mm)" at 1768.1,10143.5 h80
  text "PTH" at 3311.65,10143.5 h80
  text "Round" at 3981.88,10143.5 h80
  text "31" at 984.31,9943.5 h80
  text "20.00mil (0.508mm)" at 1768.1,9943.5 h80
  text "PTH" at 3311.65,9943.5 h80
  text "Round" at 3981.88,9943.5 h80
  text "70" at 984.31,9743.5 h80
  text "20.00mil (0.508mm)" at 1768.1,9743.5 h80
  text "NPTH" at 3311.65,9743.5 h80
  text "Round" at 3981.88,9743.5 h80
  text "179 Total" at 984.31,9543.5 h80

## Dimensions
0,3420.09 to 3500,840.16 on Drill Drawing
0,3420.09 to 1060,0 on Drill Drawing

## Text inside footprints (layer, text, board x,y; h text height)
J1: Bottom Overlay "16" at 1899,2364 h37; Bottom Overlay "15" at 1773,2360 h37; Bottom Overlay "1" at 1731,1494 h37; Bottom Overlay "2" at 1893,1494 h37
J3: Top Overlay "Battery Clip" at 257.97,724.45 h50; Top Overlay "-" at 327.47,100.45 h75 r180; Top Overlay "+" at 822.47,100.45 h75 r180; Bottom Overlay "+" at 822.47,100.45 h75 r180; Bottom Overlay "-" at 327.47,100.45 h75 r180
P1: Top Overlay "OKC" at 2151.19,1234.16 h40; Top Overlay "DOOR" at 2561.19,1229.48 h40; Top Overlay "1" at 2775,2626 h39.37; Top Overlay "TEST MODE" at 2796.19,1614.48 h40; Bottom Overlay "DOOR" at 2701.19,1232.15 h40; Bottom Overlay "OKC" at 2261.19,1236.83 h40; Bottom Overlay "ICSP" at 2836,2759.48 h55; Bottom Overlay "TEST MODE" at 3088.19,1613.98 h35; Bottom Overlay "1" at 2794.19,2631.29 h39.37